# EAGLE board Master Device (EAGLE 8.0.1)
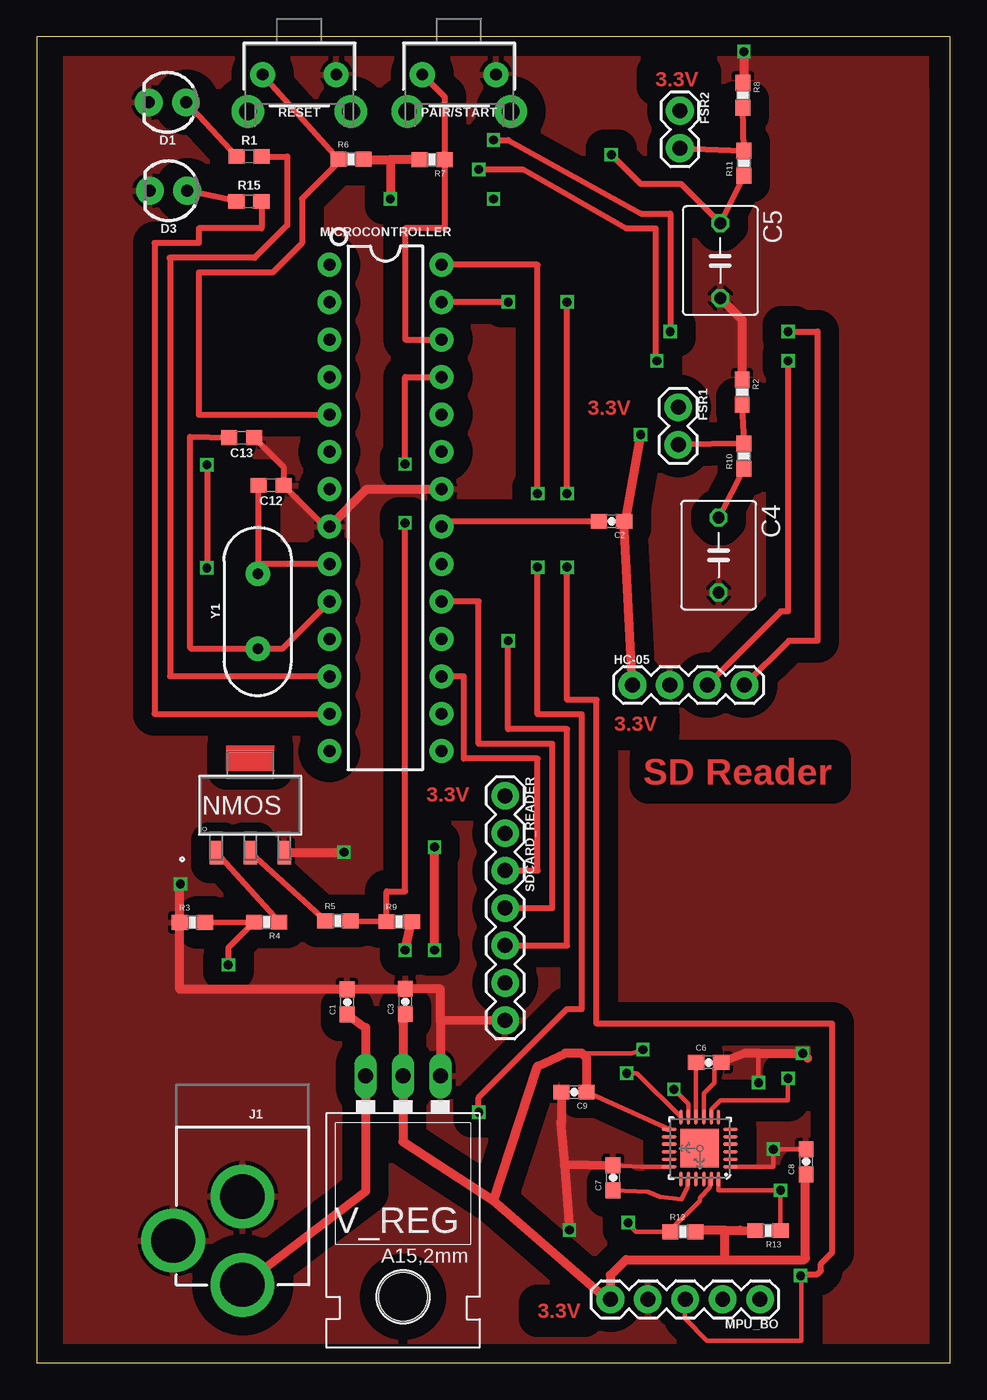
[diagram p0: board, top side]
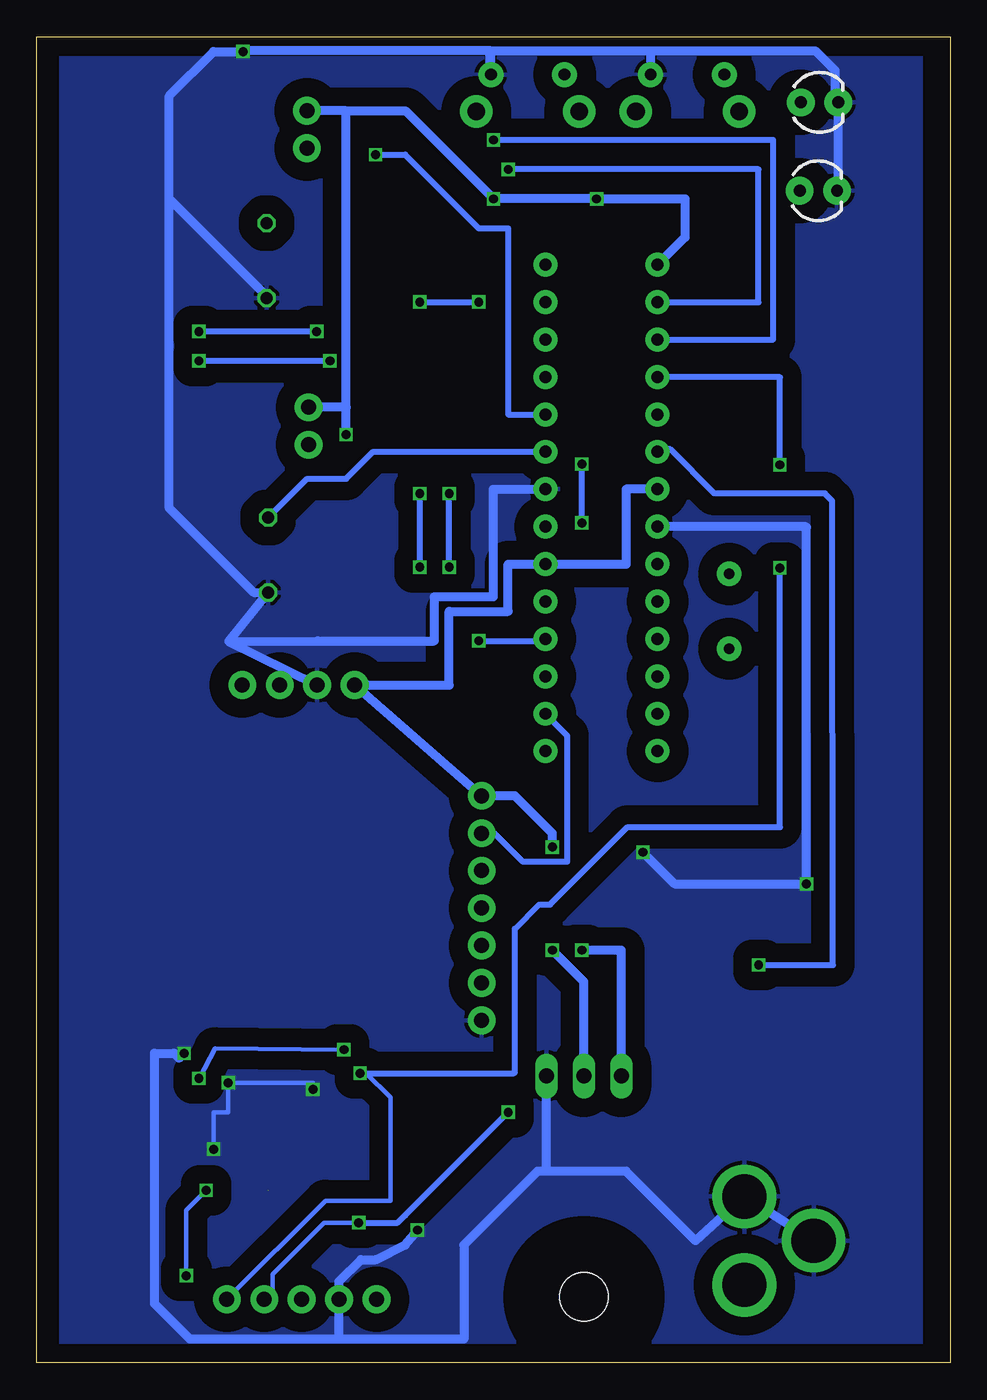
[diagram p1: board, bottom side, seen from below]

Size 62 x 90 mm. Coordinates in mm from the lower left corner, seen from the top.
Outline: 0,0 62,0 62,90 0,90 0,0
Copper layers (1*16): Top 0.035mm / dielectric 1.5mm / Bottom 0.035mm
Design rules "PCBWay_2layer": minimum track width 6mil, minimum drill 0.3mm, track to track 6mil, track to pad 6mil, pad to pad 6mil, via to via 6mil, smd to smd 4mil, copper to edge 10mil, drill to drill 6mil, minimum pad ring 6mil, minimum via ring 6mil, stop-mask expansion 4mil, vias tented up to drill 0.8mm, thermal gap 10mil
Net classes: 0 Default: width 0.203 mm

## Footprints (pad centres in the part's own frame; a part is rotated, then mirrored left to right if it is on the bottom)
0603-CAP = smd 1.1 x 1: 1 -0.85,0; 2 0.85,0
C050-050X075 = drill 0.813 octagon: 1 -2.54,0; 2 2.54,0
0603 = smd 1.1 x 1: 1 -0.85,0; 2 0.85,0
LED_3MM = drill 0.813 pad 1.88: A -1.27,0; K 1.27,0
1X02 = drill 1.016 pad 1.88: 1 0,0; 2 2.54,0
1X04 = drill 1.016 pad 1.88: 1 0,0; 2 2.54,0; 3 5.08,0; 4 7.62,0
POWER_JACK_PTH = drill 2.997 pad 4.318: GND 0,7.7; GNDBREAK 4.7,10.7; PWR 0,13.7
DIP28 = drill 0.813 pad 1.626: 1 -16.51,-3.81; 2 -13.97,-3.81; 3 -11.43,-3.81; 4 -8.89,-3.81; 5 -6.35,-3.81; 6 -3.81,-3.81; 7 -1.27,-3.81; 8 1.27,-3.81; 9 3.81,-3.81; 10 6.35,-3.81; 11 8.89,-3.81; 12 11.43,-3.81; 13 13.97,-3.81; 14 16.51,-3.81; 15 16.51,3.81; 16 13.97,3.81; 17 11.43,3.81; 18 8.89,3.81; 19 6.35,3.81; 20 3.81,3.81; 21 1.27,3.81; 22 -1.27,3.81; 23 -3.81,3.81; 24 -6.35,3.81; 25 -8.89,3.81; 26 -11.43,3.81; 27 -13.97,3.81; 28 -16.51,3.81
1X05 = drill 1.016 pad 1.88: 1 0,0; 2 2.54,0; 3 5.08,0; 4 7.62,0; 5 10.16,0
SOT-223 = smd 0.914 x 1.6: 1 -2.3,-3.2; 2 0,-3.2; 3 2.3,-3.2
TACTILE_SWITCH_PTH_RIGHT_ANGLE_KIT = drill 0.8 pad 1.7: 1 -2.5,0; 2 2.5,0 | drill 1.2 pad 2.2: ANCHOR1 -3.5,2.5; ANCHOR2 3.5,2.5
0603-RES = smd 1.1 x 1: 1 -0.85,0; 2 0.85,0
1X07 = drill 1.016 pad 1.88: 1 0,0; 2 2.54,0; 3 5.08,0; 4 7.62,0; 5 10.16,0; 6 12.7,0; 7 15.24,0
QFN-24-4MM2 = smd 1.016 x 0.254: 1 -2.066,1.257; 2 -2.066,0.75; 3 -2.066,0.247; 4 -2.066,-0.287; 5 -2.066,-0.792; 6 -2.066,-1.297; 13 2.086,-1.297; 14 2.086,-0.792; 15 2.086,-0.287; 16 2.086,0.247; 17 2.086,0.75; 18 2.086,1.257 | smd 0.254 x 1.016: 7 -1.267,-2.122; 8 -0.762,-2.122; 9 -0.258,-2.122; 10 0.278,-2.122; 11 0.78,-2.122; 12 1.287,-2.122; 19 1.287,2.082; 20 0.78,2.082; 21 0.278,2.082; 22 -0.258,2.082; 23 -0.762,2.082; 24 -1.267,2.082 | smd 2.616 x 2.616: P$1 0.02,-0.01
78XXL = drill 1.016 long: GND 0,-3.81; IN -2.54,-3.81; OUT 2.54,-3.81 | hole 3.302: 0,11.176
HC49US = drill 0.7 pad 1.651: 1 -2.54,0; 2 2.54,0

## Placement (x,y rotation side)
C1  0.1uF  [0603-CAP]  21.07,24.49 90 top
C2  0.1uF  [0603-CAP]  39.02,57.12 180 top
C3  10uF  [0603-CAP]  25.02,24.52 90 top
C4  [C050-050X075]  46.29,54.82 270 top
C5  [C050-050X075]  46.4,74.81 270 top
C6  0.1uF  [0603-CAP]  45.61,20.38 0 top
C7  2.2nF  [0603-CAP]  39.12,12.55 90 top
C8  0.1uF  [0603-CAP]  52.22,13.64 90 top
C9  10nF  [0603-CAP]  36.47,18.37 180 top
C12  22pF  [0603]  15.9,59.55 180 top
C13  22pF  [0603]  13.9,62.8 180 top
D1  RED  [LED_3MM]  8.86,85.55 180 top
D3  RED  [LED_3MM]  8.94,79.55 180 top
FRAME1  FRAME-LETTERNO_PACKAGE  [DUMMY]  11.68,30.23 0 top
FSR1  [1X02]  43.55,64.85 270 top
FSR2  [1X02]  43.66,84.98 270 top
HC-05  BLUETOOTH  [1X04]  40.43,46 0 top
J1  POWER_JACK  [POWER_JACK_PTH]  13.96,18.98 180 top
MICROCONTROLLER  ATMEGA328P  [DIP28]  23.67,58.02 270 top
MPU_BO  MPU_BO  [1X05]  49.1,4.3 180 top
NMOS  STN3NF06L  [SOT-223]  14.49,37.83 0 top
PAIR/START  PTH-RIGHT  [TACTILE_SWITCH_PTH_RIGHT_ANGLE_KIT]  28.67,87.44 180 top
R1  68 Ohm  [0603]  14.41,81.88 0 top
R2  4k  [0603-RES]  47.88,65.88 270 top
R3  20k  [0603-RES]  10.56,29.89 0 top
R4  500  [0603-RES]  15.6,29.91 180 top
R5  6k  [0603-RES]  20.44,29.99 0 top
R6  10K  [0603-RES]  21.33,81.69 0 top
R7  10K  [0603-RES]  26.83,81.66 180 top
R8  4k  [0603-RES]  47.94,86.04 270 top
R9  12k  [0603-RES]  24.6,29.94 0 top
R10  4k  [0603-RES]  48.01,61.54 90 top
R11  4k  [0603-RES]  48.01,81.43 90 top
R12  10k  [0603-RES]  43.87,8.89 0 top
R13  10k  [0603-RES]  49.64,8.96 180 top
R15  68 Ohm  [0603]  14.4,78.83 0 top
RESET  PTH-RIGHT  [TACTILE_SWITCH_PTH_RIGHT_ANGLE_KIT]  17.83,87.44 180 top
SDCARD_READER  SD_READER  [1X07]  31.8,38.48 270 top
U1  MPU-6050-1  [QFN-24-4MM2]  45.02,14.55 180 top
V_REG  LD1117V33  [78XXL]  24.86,15.65 180 top
Y1  16MHz  [HC49US]  15,51 90 top

## Library data of the parts
C1-C3 C6-C9 R12 R13 = SparkFun
C4 C5 = rcl
C12 C13 = SparkFun-Capacitors; PROD_ID: CAP-07876
D1 D3 = SparkFun-LED; PROD_ID: DIO-08794
FRAME1 = SparkFun-Aesthetics; DESIGNER: Nobody; VERSION: v01
FSR1 FSR2 MPU_BO SDCARD_READER = SparkFun-Connectors
HC-05 = SparkFun-Connectors; PROD_ID: CONN-09696
J1 = SparkFun-Connectors; PROD_ID: CONN-08197
MICROCONTROLLER = SparkFun-IC-Microcontroller; PROD_ID: IC-09136
NMOS = STN3NF06L; MANUFACTURER_PART_NUMBER: STN3NF06L; VENDOR: ST Microelectronics
PAIR/START RESET = SparkFun-Switches; PROD_ID: CONN-10672; SF_SKU: COM-10791
R1 R15 = SparkFun-Resistors
R2-R11 = SparkFun-Resistors; PROD_ID: RES-00824
U1 = Testing
V_REG = SparkFun-IC-Power
Y1 = SparkFun-Clocks; PROD_ID: XTAL-08181; SF_ID: COM-00536

## Nets
9V_BAT: C1.1 J1.PWR R9.2 V_REG.OUT
+3V3: C2.1 C3.1 C8.1 C9.1 FSR1.1 FSR2.1 HC-05.1 MICROCONTROLLER.1 MICROCONTROLLER.7 MICROCONTROLLER.20 MPU_BO.5 R6.2 R7.2 R12.2 R13.2 SDCARD_READER.1 U1.8 U1.13 V_REG.GND
FSR1: C4.1 MICROCONTROLLER.23 R10.1
FSR2: C5.1 MICROCONTROLLER.24 R11.1
GND: C1.2 C3.2 C4.2 C5.2 C6.2 C7.2 C8.2 C9.2 C12.1 C13.1 D1.K D3.K HC-05.2 J1.GND J1.GNDBREAK MICROCONTROLLER.8 MICROCONTROLLER.22 MPU_BO.4 NMOS.3 PAIR/START.1 R2.1 R3.1 R8.1 RESET.1 SDCARD_READER.7 U1.1 U1.9 U1.11 U1.18 V_REG.IN
MPU_INT: MICROCONTROLLER.4 MPU_BO.1 U1.12
N$1: C2.2 MICROCONTROLLER.21
N$2: MICROCONTROLLER.5 R6.1 RESET.2
N$3: MICROCONTROLLER.26 PAIR/START.2 R7.1
N$4: MICROCONTROLLER.12 R1.2
N$5: MICROCONTROLLER.13 R15.2
N$6: D3.A R15.1
N$7: D1.A R1.1
N$8: FSR1.2 R2.2 R10.2
N$9: C7.1 U1.20
N$10: C6.1 U1.10
N$11: NMOS.1 R4.1
N$12: NMOS.2 R5.1
N$13: C13.2 MICROCONTROLLER.10 Y1.1
N$14: FSR2.2 R8.2 R11.2
N$15: C12.2 MICROCONTROLLER.9 Y1.2
RXA: HC-05.3 MICROCONTROLLER.2
SCL: MICROCONTROLLER.28 MPU_BO.2 R12.1 U1.23
SD_CS: MICROCONTROLLER.16 SDCARD_READER.2
SDA: MICROCONTROLLER.27 MPU_BO.3 R13.1 U1.24
SENSE: MICROCONTROLLER.25 R5.2 R9.1
SPI_MISO: MICROCONTROLLER.18 SDCARD_READER.5
SPI_MOSI: MICROCONTROLLER.17 SDCARD_READER.3
SPI_SCLK: MICROCONTROLLER.19 SDCARD_READER.4
TXA: HC-05.4 MICROCONTROLLER.3
V_MON: MICROCONTROLLER.6 R3.2 R4.2

## Tracks (layer width: path | path; a pad name or v marks a point on that pad's centre or on a via)
9V_BAT  (via drill 0.6)
  Top 0.61: J1.PWR 22.32,11.64 V_REG.OUT 22.32,22.74 C1.1 | v25,28 R9.2
  Bottom 0.61: V_REG.OUT 22.32,28 v25,28
+3V3  (via drill 0.6)
  Top 0.305: C9.1 U1.13 | U1.8 45.78,17.18 46.4,17.8 51,17.8 v51,19.3 | v41.15,21.25 40.4,21 37,21
  Top 0.406: U1.13 42.84,15.85
  Top 0.61: R6.2 22.21,81.66 24,81.66 | R7.2 24,81.66 | C3.1 24.86,23.06 V_REG.GND 24.86,15 31,11 | 31,11 34,20.12 35.88,21 37,21 37.32,20.68 C9.1 | 24,81.66 v24,79 | v41,63 40,57.25 C2.1 HC-05.1 | 46.7,7 40,7 38.94,5.94 MPU_BO.5 38.7,4.3 31,11 | 46.7,7 46.7,9 | 46.7,9 44.83,9 R12.2 | 46.7,9 47.75,9 R13.2 | 46.7,7 52.1,7 52.19,7.09 52.19,12.76 C8.1 | v27,28 v27,35
  Bottom 0.305: v41.15,21.25 49.9,21.35 50.95,19.35 v51,19.3
  Bottom 0.61: MICROCONTROLLER.1 18,76.39 18,79 v24,79 v31,79 36.98,84.98 41,84.98 | 41,84.98 FSR2.1 | 41,64.85 FSR1.1 | 41,64.85 41,84.98 | v41,63 41,64.85 | V_REG.GND 24.86,25.86 v27,28 | v27,35 27,35.94 29.54,38.48 SDCARD_READER.1 HC-05.1 34,46 34,51 30,51 30,54.21 MICROCONTROLLER.20 22,54.21 22,59.29 MICROCONTROLLER.7
FSR1
  Top 0.406: R10.1 C4.1
  Bottom 0.406: C4.1 43.65,60 41,60 39.17,61.83 MICROCONTROLLER.23
FSR2  (via drill 0.6)
  Top 0.406: R11.1 C5.1 43.75,80 41,80 v39,82
  Bottom 0.406: v39,82 37,82 32,77 30,77 30,64.37 MICROCONTROLLER.24
GND  (via drill 0.6)
  Top 0.305: C7.2 41.04,13.3 U1.18 | C6.2 46,19.92 46,19 45.28,18.28 U1.9 | v43.25,18.55 44.24,17.56 U1.11 | U1.1 50,13.3 v50,14.49 C8.2 | v49,19 49,21
  Top 0.406: C13.1 16.75,60.8 C12.1 19.55,56.75 MICROCONTROLLER.8
  Top 0.61: 35.81,13.45 v36.16,9 | 35.81,13.45 C7.2 | 27.4,23.2 V_REG.IN | 27.4,23.2 27.4,25.37 C3.2 25.02,25.34 C1.2 9.71,25.34 R3.1 9.71,32.46 v9.75,32.5 | NMOS.3 v20.85,34.65 | SDCARD_READER.7 27.4,23.2 | v48,89 48,86.89 R8.1 | C5.2 47.88,70.79 R2.1 | C6.2 48.08,21 49,21 v52,21 52.34,20.66 | C8.2 52.34,14.61 | C9.2 35.62,16.33 35.56,16.33 35.81,13.45 | MICROCONTROLLER.8 22.4,59.29 MICROCONTROLLER.22
  Bottom 0.305: v50,14.49 50,17 49,17 v49,19 43.25,19 v43.25,18.55
  Bottom 0.61: D3.K 7.59,79.55 D1.K 7.8,85.76 7.8,87.7 9.15,89.05 20.33,89.05 | 20.33,89.05 RESET.1 | 20.33,89.05 31.25,89.05 31.25,87.44 PAIR/START.1 31.17,89.05 47.95,89.05 47.95,89 v48,89 50,89 53,86 53,79 | J1.GNDBREAK J1.GND 17.28,8.28 22,13 27.4,13 | 27.4,13 V_REG.IN | 27.4,13 28,13 33,8 33,1.6 41.48,1.6 | 41.48,1.6 MPU_BO.4 41.48,5.52 40,7 39,7 37,8 v36.16,9 | v20.85,34.65 18.7,32.5 v9.75,32.5 | v9.75,32.5 9.7,32.5 | C5.2 46.4,72.4 53,79 | 53,79 53,58 47.28,52.28 C4.2 48.97,48.96 | 48.97,48.96 HC-05.2 | 41.48,1.6 51.6,1.6 54,4 54,21 52.68,21 52.34,20.66 v52,21 | v9.75,32.5 9.75,56.7 9.8,56.75 MICROCONTROLLER.8 | 48.97,48.96 42.93,49 35,49 35,52 31,52 31,59.29 MICROCONTROLLER.22
  pour Bottom (isolate 1.27): 2,89 7.3,89.3 55.15,89.3 60.35,89.1 60.35,0.65 7.2,0.65 2,0.85
  pour Top (isolate 1.27): 2,89 60.35,89 60.35,86.5 60.4,86.5 60.4,0.55 6.8,0.55 6.8,0.75 2,0.75
MPU_INT  (via drill 0.6)
  Top 0.305: v40.05,19.65 40.76,19.65 U1.12
  Top 0.406: v11.55,53.95 11.6,53.95 11.6,60.8 11.55,60.8 v11.55,60.95
  Bottom 0.305: MPU_BO.1 42.4,11 38,11 38,18 39.65,19.65 v40.05,19.65
  Bottom 0.406: v40.05,19.65 29.6,19.65 29.55,19.7 29.55,29.45 27.9,31.1 27.15,31.1 21.9,36.35 11.55,36.35 v11.55,53.95 | v11.55,60.95 11.55,66.9 MICROCONTROLLER.4
N$1
  Top 0.406: MICROCONTROLLER.21 27.85,57.12 C2.2
N$2
  Top 0.406: RESET.2 R6.1 20.48,81.48 18,79 18,76 16,74 11,74 11,64.35 19.84,64.35 MICROCONTROLLER.5
N$3
  Top 0.406: PAIR/START.2 27.68,85.93 R7.1 27.68,77 25,77 25,69.45 MICROCONTROLLER.26
N$4
  Top 0.406: R1.2 17,81.88 17,77.2 14.8,75 9,75 9.05,75 9.05,46.6 MICROCONTROLLER.12
N$5
  Top 0.406: R15.2 15.25,77 11,77 11,76 8,76 8,44.05 MICROCONTROLLER.13
N$6
  Top 0.406: R15.1 D3.A
N$7
  Top 0.406: R1.1 D1.A
N$8
  Top 0.406: FSR1.2 R10.2 R2.2
N$9
  Top 0.305: C7.1 41.5,11.6 42.3,11.25 43.76,11.1 44.16,11.91 44.16,12.39 U1.20
N$10
  Top 0.305: C6.1 U1.10
  Top 0.406: 44.74,20.36 C6.1
N$11
  Top 0.406: R4.1 NMOS.1
N$12
  Top 0.406: NMOS.2 R5.1
N$13
  Top 0.406: MICROCONTROLLER.10 16.65,48.46 Y1.1 10.5,48.45 10.4,48.55 10.4,62.85 C13.2
N$14
  Top 0.406: R8.2 R11.2 FSR2.2
N$15
  Top 0.406: MICROCONTROLLER.9 15,54.21 Y1.2 15.05,53.59 C12.2
RXA  (via drill 0.6)
  Top 0.406: v30,81 33,81 40,77 42,77 42,68 v42.1,68 | v51,68 51,51 50.51,51 HC-05.3
  Bottom 0.406: MICROCONTROLLER.2 13,71.99 13,81 v30,81 | v42.1,68 v51,68
SCL  (via drill 0.6)
  Top 0.305: U1.23 45.71,12.4 45.71,11.91 45,11.2 45,11 43.02,9.02 R12.1 40.66,8.89 40.15,9.4 v40.15,9.5
  Top 0.406: v30,17 30,18 36,24 37,24 37,44 34,44 v34,54 | v34,59 34,74.53 MICROCONTROLLER.28
  Bottom 0.305: v40.15,9.5 42.5,9.5 46,6 46,4.86 MPU_BO.2
  Bottom 0.406: v40.15,9.5 37.5,9.5 37,10 v30,17 | v34,54 v34,59
SD_CS
  Bottom 0.406: MICROCONTROLLER.16 26,42.57 26,34 29,34 30.94,35.94 SDCARD_READER.2
SDA  (via drill 0.6)  (1 unrouted)
  Top 0.305: U1.24 46.29,11.71 | 46.29,12 46.29,11.7 50.45,11.7 v50.5,11.7 v50.49,11.69 R13.1 | v51.85,5.9 51.9,5.86 51.9,1.5 45.5,1.5 44,3 44,4.28 MPU_BO.3
  Top 0.406: v51.85,5.9 51.85,6 53,6 53.24,6.24 53.24,6.71 54,7.48 54,23 38,23 38,45 36,45 v36,54 | v36,59 v36,72 | v32,72 v32,71.99 MICROCONTROLLER.27
  Bottom 0.305: v50.5,11.7 51.85,10.35 51.85,5.95 v51.85,5.9
  Bottom 0.406: v36,54 v36,59 | v36,72 v32,72
SENSE  (via drill 0.6)
  Top 0.406: R5.2 R9.1 23.75,32 25,32 v25,57 | v25,61 25,66.91 MICROCONTROLLER.25
  Bottom 0.406: v25,57 v25,61
SPI_MISO  (via drill 0.6)
  Top 0.406: SDCARD_READER.5 36,28.32 36,43 32,43 v32,49
  Bottom 0.406: v32,49 27.48,49 MICROCONTROLLER.18
SPI_MOSI
  Top 0.406: SDCARD_READER.3 34,33.4 34,41 29,41 29,46.59 MICROCONTROLLER.17
SPI_SCLK
  Top 0.406: SDCARD_READER.4 35,30.86 35,42 30,42 30,51.67 MICROCONTROLLER.19
TXA  (via drill 0.6)
  Top 0.406: v31,83 32,83 41,78 43,78 v43,70 | v51,70 53,70 53,49 51.05,49 HC-05.4
  Bottom 0.406: MICROCONTROLLER.3 12,69.45 12,83 v31,83 | v43,70 v51,70
V_MON  (via drill 0.6)
  Top 0.406: R3.2 R4.2 13,28.16 v13,27
  Bottom 0.406: v13,27 7.95,27 8,58.5 8.5,59 16,59 19,62 19.69,62 MICROCONTROLLER.6 19.86,61.85

## Text on the board
Top: 3.3V | 3.3V | 3.3V | SD Reader | 3.3V | 3.3V